# Altium PCB RF_Filter.PcbDoc
Units mm, origin at the board's own origin, x right, y up, seen from the top; angles counter-clockwise.
Board outline 40 x 25 mm, 2 copper layers (Top Layer, Bottom Layer), stack 1.601 mm thick; 5 components, 3 nets, 12 pads, 0 vias.
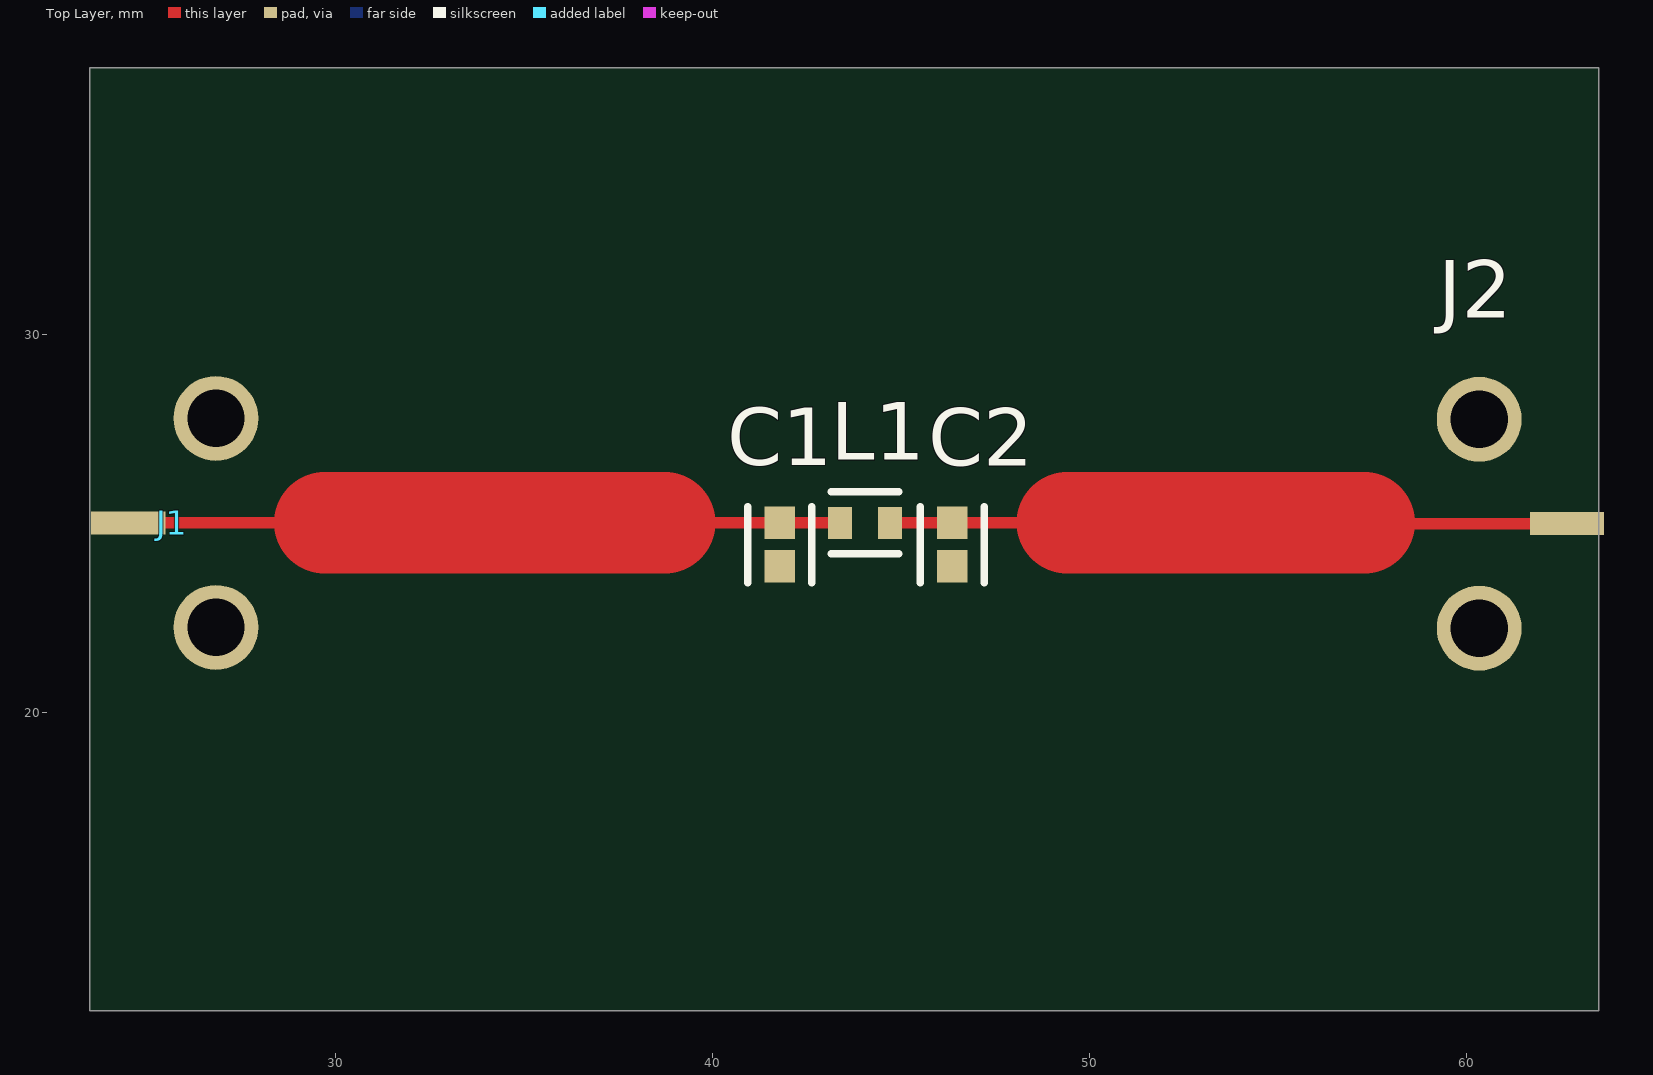
[diagram p0: Top Layer view]
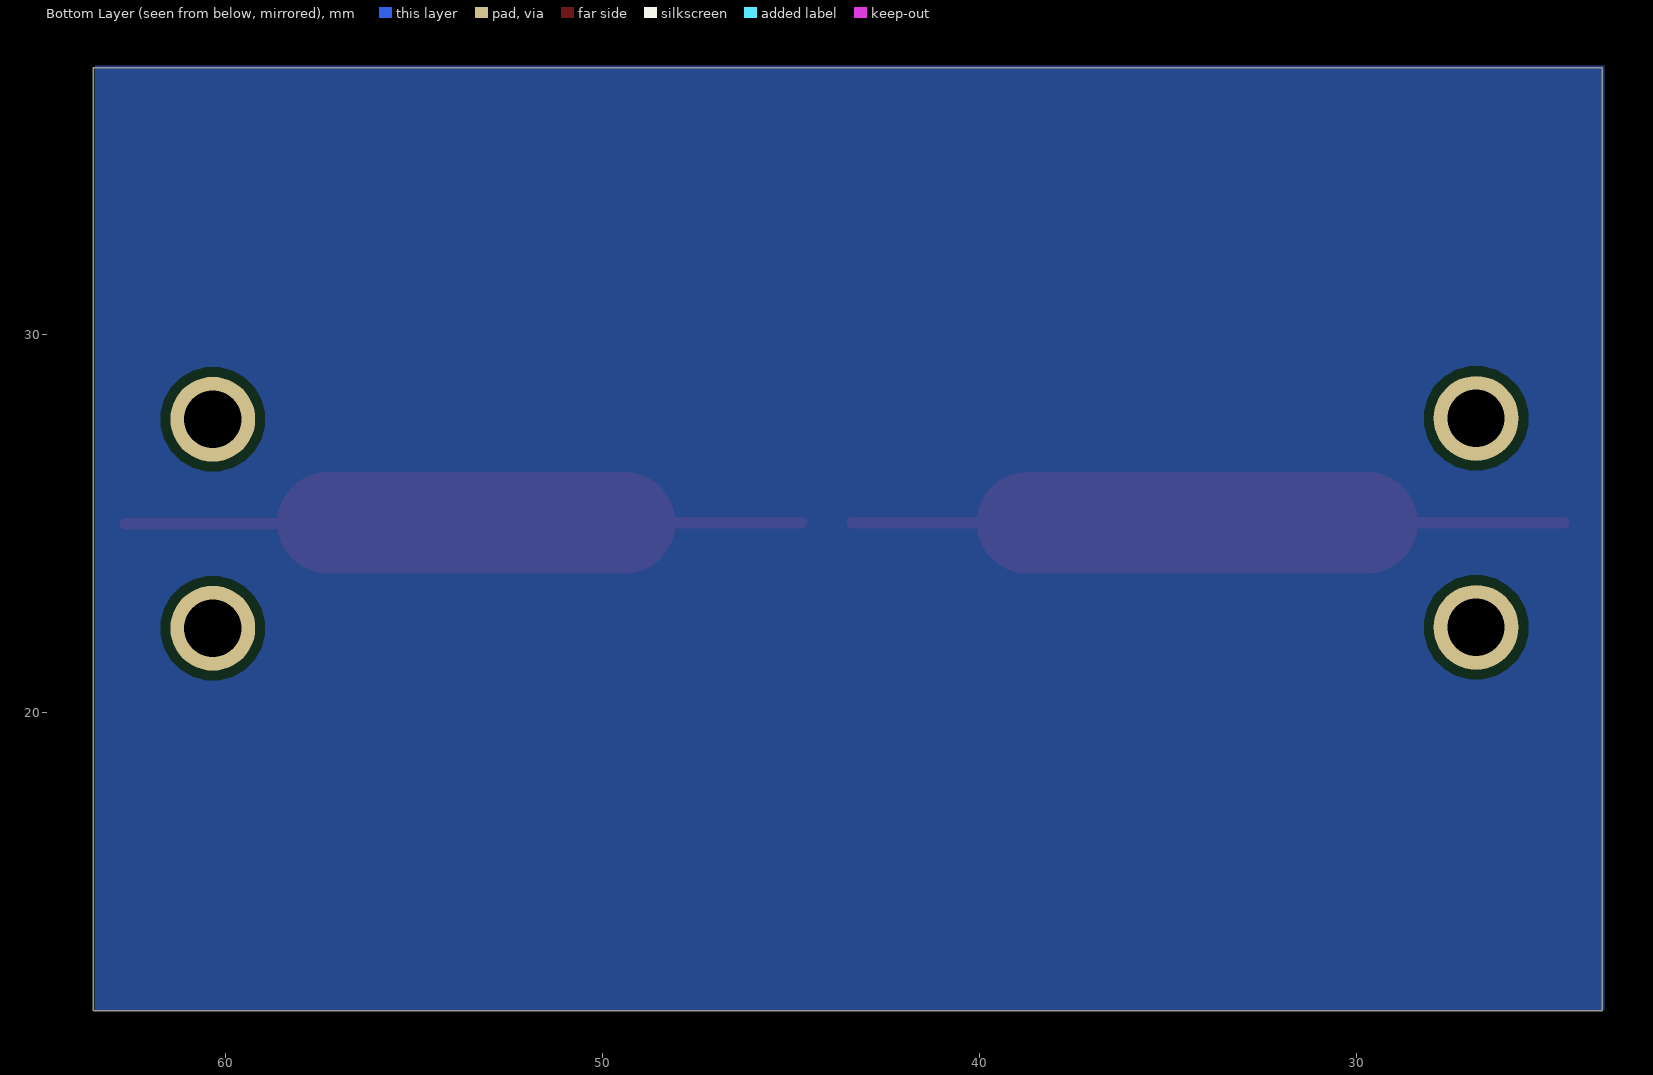
[diagram p1: Bottom Layer view, seen from below]

## Layer stack, top to bottom
Top Solder: solder mask 0.0102, Solder Resist, Dk 3.5
Top Layer: signal copper 0.0356
Dielectric 1: dielectric 1.53, FR-4, Dk 4.8
Bottom Layer: signal copper 0.0356
Bottom Solder: solder mask 0.0102, Solder Resist, Dk 3.5

## Board outline
23.495,12.084 63.495,12.084 63.495,37.084 23.495,37.084

## Design rules (kind name [scope] priority, off if disabled: settings)
Clearance [All] p1: gap=0.254 ignorepadtopadclearanceinfootprint=FALSE
PolygonConnect [All] p1: connectstyle=Direct reliefconductorwidth=0.254 reliefentries=4 polygonreliefangle="90 Angle" airgapwidth=0.254
RoutingLayers RF_TopOnly [InNet('RF_IN') Or InNet('RF_OUT')] p1: top layer_v5=TRUE bottom layer_v5=FALSE
RoutingLayers [All] p2: top layer_v5=TRUE bottom layer_v5=TRUE
RoutingVias [All] p1: holewidth=0.711 width=1.27 viastyle="Through Hole" minholewidth=0.711 minwidth=1.27 maxholewidth=0.711 maxwidth=1.27
SolderMaskExpansion [All] p1: expansion=0 istentingtop=FALSE
SupplyNets "Schematic Supply Nets" [InNet('GND')] p1: voltage=0.000
Width RF_Width [InNet('RF_IN') Or InNet('RF_OUT')] p1: maxlimit=2.69 minlimit=0.3 preferedwidth=2.69 bottomlayer_minwidth=2.69 impedanceprofiledriven=TRUE impedanceprofileid={BF800E0A-AA06-4801-90B2-C2DD255972BB} impedanceprofilevalue=50.000000 minimp=50.000000 maximp=50.000000 favimp=50.000000
Width [All] p2: maxlimit=0.254 minlimit=0.254 preferedwidth=0.254
29 further rules are at their usual default settings.

## Components (designator, comment, footprint, x,y, rotation, side; value= is the part's Value field where it differs from the comment)
C1 "CC0603JRNPO9BN330" FP-CC0603-0_9-IPC_C 41.783,24.442 r270 top
C2 "CC0603JRNPO9BN330" FP-CC0603-0_9-IPC_C 46.355,24.442 r270 top
J1 "60312202114511" 60312202114511 17.936,25.019 r270 top
J2 "60312202114511" 60312202114511 69.225,24.995 r90 top
L1 "LQW18ANR16G0ZD" FP-LQW18AN_00-MFG 44.041,25.019 r0 top

## Footprints (in the part's own frame and the unit in brackets; to place one, negate y for a bottom-side part, rotate by r counter-clockwise, add the part's x,y. Pads: shape width x height; smd on the part's side, far side on the other; paste and mask are expansions set on the pad)
60312202114511 [mm] "SMA PCB End Launch Jack Flat Tab  with THT Grounding Pins for 2.8mm  Max. PCB"
  rect 0.61x1.97 smd: 1(0,6.575)
  round 2.25 hole 1.52: 2(-2.77,8.9) 3(2.77,8.9)
  body extent -3.17,-3.94 3.17,9.4, height 3.32
FP-CC0603-0_9-IPC_C [mm]
  rect 0.858x0.812 smd paste+0 mask+0: 1(-0.577,0) 2(0.577,0)
  silkscreen extent -1.01,-0.85 1.01,0.85, body extent -1.11,-0.55 1.11,0.55, height 0.25
FP-LQW18AN_00-MFG [mm]
  rect 0.625x0.85 smd paste+0 mask+0: 1(-0.663,0) 2(0.663,0)
  silkscreen extent -0.9,-0.82 0.9,0.82, body extent -1.07,-0.6 1.07,0.6, height 0.25

## Part data
C1 C2: library part CMP-2000-06072-2, "CAP CER 33PF 50V C0G/NPO 0603", Capacitance=33pF, Case Code (Imperial)=0603, Case Code (Metric)=1608, Dielectric=C0G, Dielectric Material=Ceramic, Insulation Resistance=100GR, Max Operating Temperature=125°C, Min Operating Temperature=-55°C, Package Quantity=1, Temperature Coefficient=30ppm/°C, Tolerance=5%, Voltage=50V, Case/Package=0603, Depth=0.8mm, Height=0.8mm, Lead Free="Lead Free", Length=1.6mm, Mount="Surface Mount", Number of Pins=2, Packaging="Tape and Reel", Radiation Hardening=No, REACH SVHC="No SVHC", Resistor Type=Ceramic, RoHS Compliant=Yes, Series=CC, Termination=SMD/SMT, Thickness=0.035inch, Voltage Rating=50V, Voltage Rating (DC)=50V, Width=0.031inch
J1 J2: library part CMP-03913-97004430-2, "Rf Coax Conn, Sma Jack, 50 Ohm, Pcb Rohs Compliant: Yes", Insulation Resistance=5GΩ, Max Operating Temperature=165°C, Min Operating Temperature=-65°C, Connector Type=SMA, Impedance=50Ω, Insertion Loss (dB)=0.14dB, Insulation Material=PTFE, Orientation=Straight
L1: library part CMP-06042-014901-1, "Wire Wound RF Inductor for Automotive 160nH ±2% 150mA 2.1Ω 0603 (1608)"

## Nets (pads, with @x,y where several pads share a name; then routed paths per layer and width w, separated by ;. In a path a pad name is that pad's centre, name@x,y a point inside that pad or via, vN(x,y) a via of type N, cw(c..) or ccw(c..) an arc to the next point about the centre after c; other vN are vias at no path point)
GND: 
RF_IN: C1.1 J1.1 | length 18.9
  Top Layer w0.3: J1.1 29.718,25.019 ; 38.735,25.019 C1.1 43.379,25.019
  Top Layer w2.69: 29.718,25.019 38.735,25.019
RF_OUT: C2.1 J2.1 L1.2 | length 18
  Top Layer w0.3: L1.2 C2.1 49.403,25.019 ; 57.277,25.019 57.301,24.995 J2.1
  Top Layer w2.69: 49.403,25.019 57.277,25.019
pads on no net: C1.2 C2.2 J1.2 J1.3 J2.2 J2.3 L1.1

## Polygon pours and split planes (outlines as drawn)
GND on Bottom Layer "GND_L02_P000" (solid, pour order 0): 23.441,37.132 63.446,37.132 63.446,12.113 23.441,12.113

## Text inside footprints (layer, text, board x,y; h text height)
J1: Assembly Notes "PCB End" at 22.826,26.419 h0.8 r270; Assembly Notes "PCB Thickness 2.8mm max." at 13.226,29.219 h0.8 r270
J2: Assembly Notes "PCB End" at 64.335,23.595 h0.8 r90; Assembly Notes "PCB Thickness 2.8mm max." at 73.935,20.795 h0.8 r90